# EAGLE board Cansat-2025-2 (EAGLE 9.4.2)
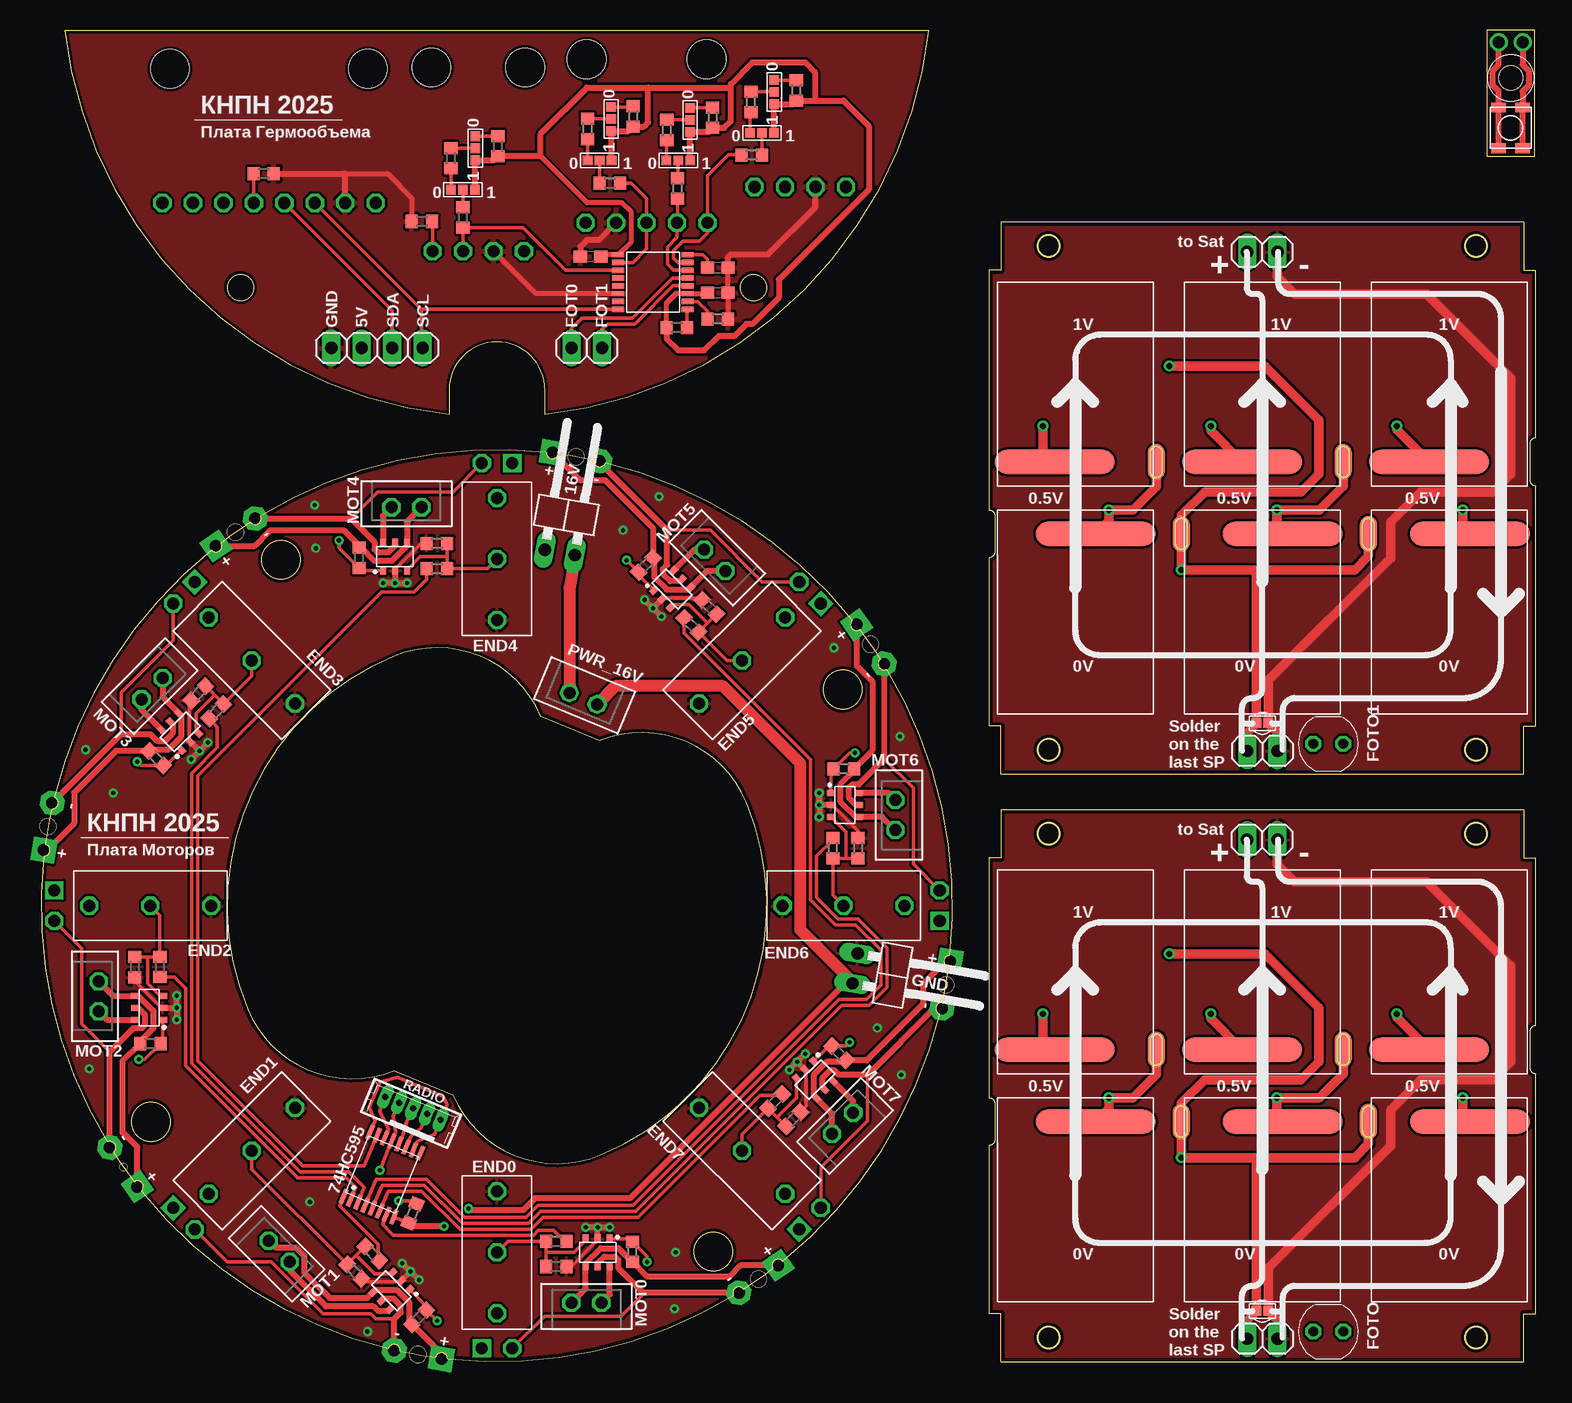
[diagram p0: board, top side]
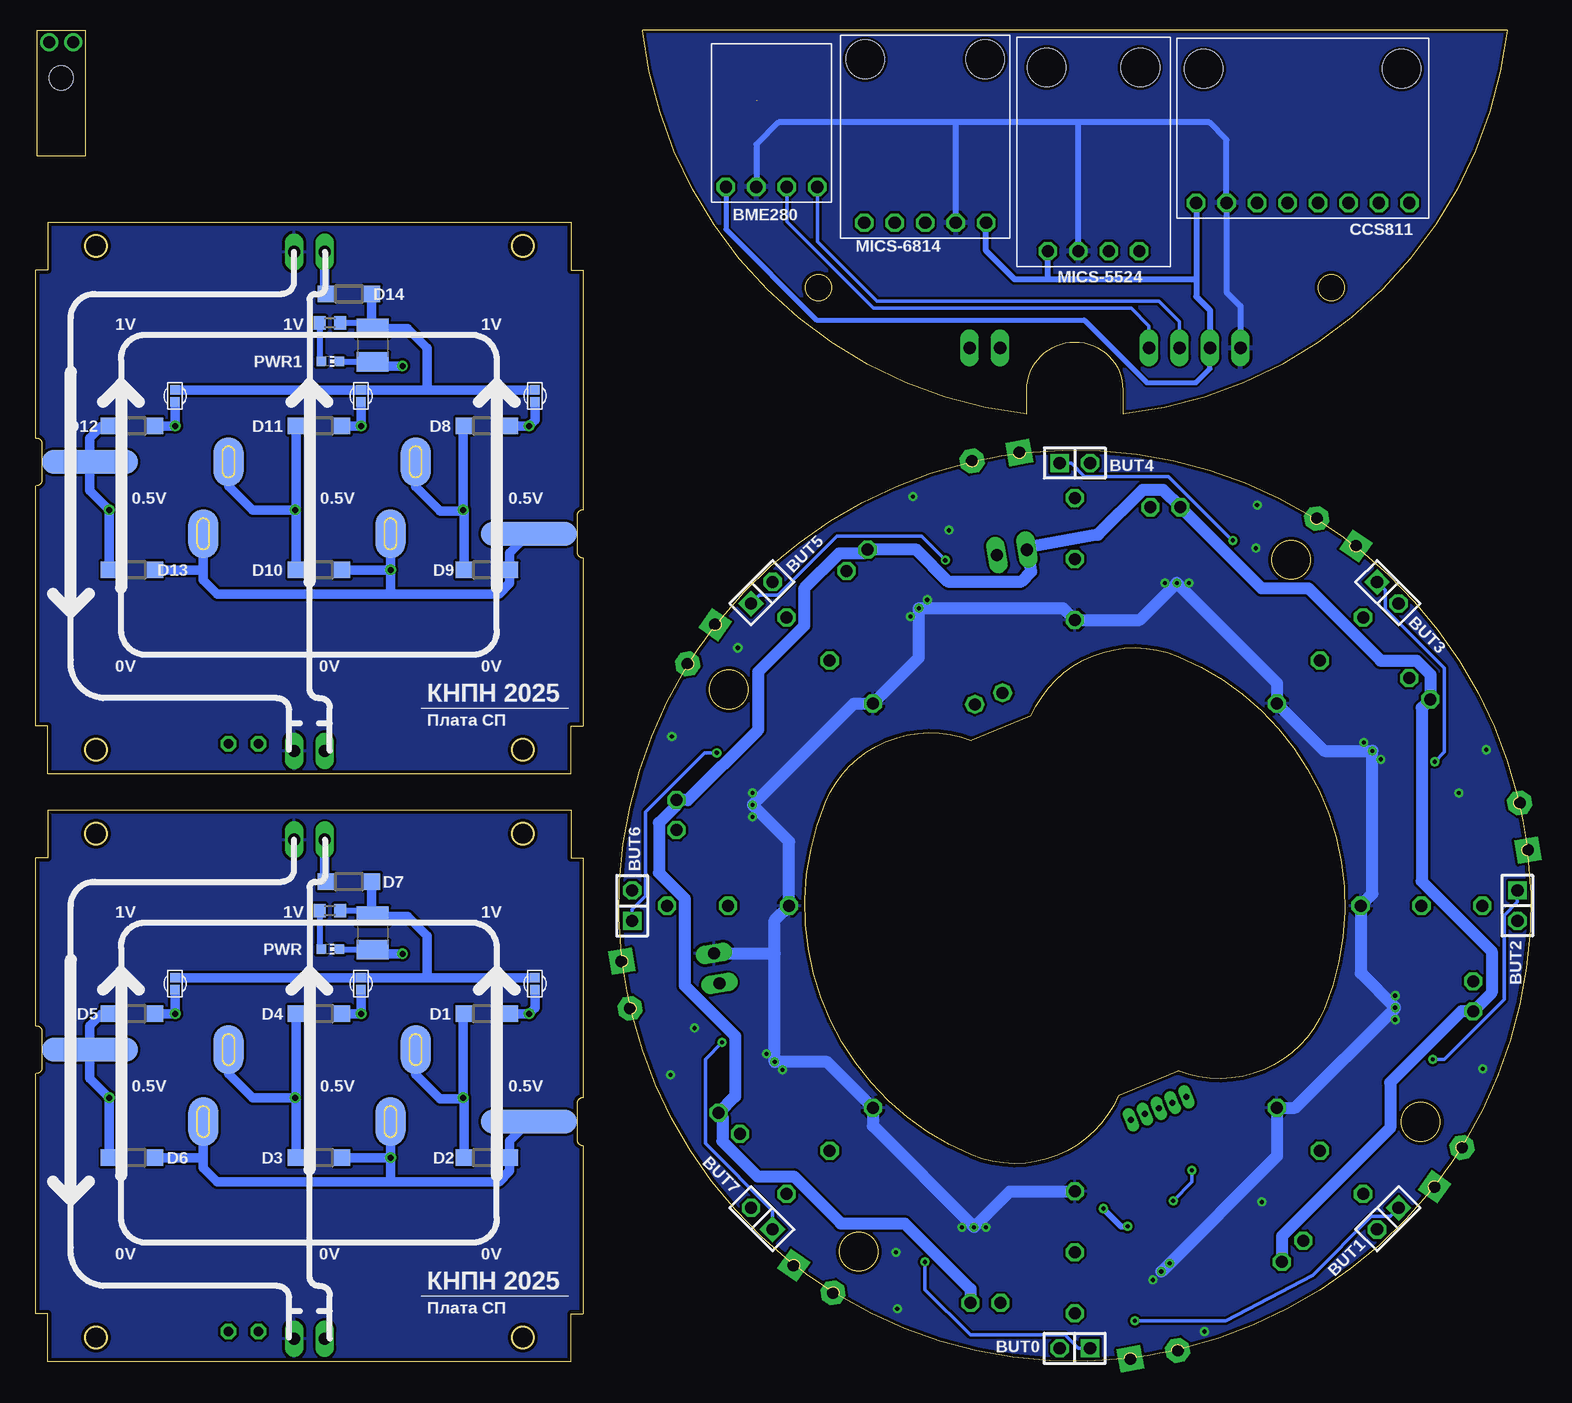
[diagram p1: board, bottom side, seen from below]

Size 124.59 x 111 mm. Coordinates in mm from the lower left corner, seen from the top.
Outline: 79.99,0 123.59,0 123.59,4 124.59,4 124.59,24 arc-90 124.09,24.5 124.09,27.5 arc-90 124.59,28 124.59,42 123.59,42 123.59,46 79.99,46 79.99,42 78.99,42 78.99,22 arc-90 79.49,21.5 79.49,18.5 arc-90 78.99,18 78.99,4 79.99,4 79.99,0
Outline: 79.99,49 123.59,49 123.59,53 124.59,53 124.59,73 arc-90 124.09,73.5 124.09,76.5 arc-90 124.59,77 124.59,91 123.59,91 123.59,95 79.99,95 79.99,91 78.99,91 78.99,71 arc-90 79.49,70.5 79.49,67.5 arc-90 78.99,67 78.99,53 79.99,53 79.99,49
Outline: 33.86,0.22 arc167 32.87,0.34 arc-5 29.91,0.87 arc167 28.95,1.09 arc-37 8.36,14.21 arc167 7.74,14.99 arc-5 6.02,17.45 arc167 5.5,18.29 arc-37 0.21,42.13 arc167 0.33,43.12 arc-5 0.85,46.07 arc167 1.08,47.04 arc-37 14.19,67.63 arc167 14.98,68.24 arc-5 17.44,69.96 arc167 18.28,70.49 arc-37 42.12,75.78 arc167 43.1,75.65 arc-5 46.06,75.13 arc167 47.03,74.91 arc-37 67.62,61.79 arc167 68.23,61.01 arc-5 69.95,58.55 arc167 70.48,57.71 arc-37 75.76,33.87 arc167 75.64,32.88 arc-5 75.12,29.93 arc167 74.9,28.96 arc-37 61.78,8.37 arc167 60.99,7.76 arc-5 58.54,6.04 arc167 57.69,5.51 arc-37 33.86,0.22
Outline: 34.34,22.19 29.39,24.24 arc-89 17.2,29.39 arc-90 29.38,58.79 arc-89 41.63,53.81 46.59,51.76 arc-89 58.77,46.61 arc-90 46.6,17.21 arc-89 34.34,22.19
Outline: 33.99,81 33.99,78.97 arc-77 1.96,111 74.02,111 arc-77 41.99,78.97 41.99,81 arc180 33.99,81
Outline: 120.49,100.5 124.49,100.5 124.49,111 120.49,111 120.49,100.5
Outline: circle at 83.99,2 radius 0.9
Outline: circle at 119.59,2 radius 0.9
Outline: circle at 119.59,44 radius 0.9
Outline: circle at 83.99,44 radius 0.9
Outline: circle at 83.99,51 radius 0.9
Outline: circle at 119.59,51 radius 0.9
Outline: circle at 119.59,93 radius 0.9
Outline: circle at 83.99,93 radius 0.9
Outline: circle at 9.15,19.98 radius 1.6
Outline: circle at 19.97,66.83 radius 1.6
Outline: circle at 56,9.17 radius 1.6
Outline: circle at 66.82,56.02 radius 1.6
Outline: circle at 16.61,89.53 radius 1.1
Outline: circle at 59.36,89.53 radius 1.1
Copper layers (1*16): Top 0.035mm / dielectric 1mm / Bottom 0.035mm
Design rules "default *": minimum track width 0.2mm, minimum drill 0.35mm, track to track 0.2mm, track to pad 0.2mm, pad to pad 0.2mm, via to via 0.2mm, smd to smd 6mil, copper to edge 10mil, drill to drill 6mil, minimum pad ring 10mil, minimum via ring 8mil, stop-mask expansion 4mil, vias tented up to drill 0mil, thermal gap 10mil
Holes 2 mm at 122.49,107

## Footprints (pad centres in the part's own frame; a part is rotated, then mirrored left to right if it is on the bottom)
1X02/90 = drill 1.016 long: 1 -1.27,-3.81; 2 1.27,-3.81
TSSOP16 = smd 1.26 x 0.36: 1 -2.9,2.275; 2 -2.9,1.625; 3 -2.9,0.975; 4 -2.9,0.325; 5 -2.9,-0.325; 6 -2.9,-0.975; 7 -2.9,-1.625; 8 -2.9,-2.275; 9 2.9,-2.275; 10 2.9,-1.625; 11 2.9,-0.975; 12 2.9,-0.325; 13 2.9,0.325; 14 2.9,0.975; 15 2.9,1.625; 16 2.9,2.275
BME280-PINS-ONLY = drill 1.016 octagon: P$1 -3.81,5.33; P$2 -1.27,5.33; P$3 1.27,5.33; P$4 3.81,5.33
1X02 = drill 1.016 square: 1 -1.27,0 | drill 1.016 octagon: 2 1.27,0
C1210 = smd 1.6 x 2.7: 1 -1.4,0; 2 1.4,0
C0603 = smd 1.1 x 1: 1 -0.85,0; 2 0.85,0
CSS811 = drill 1.016 octagon: P$1 6.23,-8.89; P$2 6.23,-6.35; P$3 6.23,-3.81; P$4 6.23,-1.27; P$5 6.23,1.27; P$6 6.23,3.81; P$7 6.23,6.35; P$8 6.23,8.89 | hole 3.2: -4.95,-8.25; -4.95,8.25
SOD123 = smd 1.4 x 1.4: A 1.9,0; C -1.9,0
CONCEVIC = drill 1 octagon: P$1 0,5.08; P$2 0,0; P$3 0,-5.08
VT93N1-VERT = drill 0.8 octagon: P$1 -1.25,0; P$2 1.25,0
1X02' = drill 1.016 long: 1 -1.27,0; 2 1.27,0
1X04 = drill 1.016 long: 1 -3.81,0; 2 -1.27,0; 3 1.27,0; 4 3.81,0
MICS-5524 = drill 1.016 octagon: P$1 -3.81,8.28; P$2 -1.27,8.28; P$3 1.27,8.28; P$4 3.81,8.28 | hole 3.2: -3.9,-7.05; 3.9,-7.05
MICS-6814 = drill 1.016 octagon: P$1 -5.08,7.18; P$2 -2.54,7.18; P$3 0,7.18; P$4 2.54,7.18; P$5 5.08,7.18 | hole 3.2: -5,-6.45; 5,-6.45
JST-2-2.5 = drill 1 pad 1.5 octagon: 1 1.25,0; 2 -1.25,0
CHIP-LED0603 = smd 0.8 x 0.8: A 0,-0.75; C 0,0.75
R0603 = smd 1 x 1.1: 1 -0.85,0; 2 0.85,0
53047-05 = drill 0.5 pad 0.698 long: 1 2.5,0.45; 2 1.25,0.45; 3 0,0.45; 4 -1.25,0.45; 5 -2.5,0.45
SOLAR_0-2_INVERT = smd 2 x 10: IN-2 -6.5,1.7 | smd 4.1 x 2.5 bottom: OUT-2 -6.5,-6.75 | smd 3 x 1.4: OUT-21 -6.5,-6.75
SOLAR_1-2_INVERT = smd 2 x 10: IN-2 -6.5,1.7 | smd 2 x 8 bottom: OUT -6.5,-2.7
VIAS-CONNECT = smd 0.8 x 0.8: 1 -0.5,0; 2 0.5,0
TSOP-6 = smd 0.5 x 0.7: P$1 -1,-1.15; P$2 0,-1.15; P$3 1,-1.15; P$4 1,1.15; P$5 0,1.15; P$6 -1,1.15
CONNECT_3 = smd 0.8 x 0.8: 1 1,0; 2 0,0; 3 -1,0
CONTACT_SIDE_4MM_2PIN = drill 1 pad 2 square: P$1 -2,0 | drill 1 pad 2 octagon: P$2 2,0
AD5593 = smd 0.45 x 1: P$1 -2.275,-2.9; P$2 -1.625,-2.9; P$3 -0.975,-2.9; P$4 -0.325,-2.9; P$5 0.325,-2.9; P$6 0.975,-2.9; P$7 1.625,-2.9; P$8 2.275,-2.9; P$9 2.275,2.9; P$10 1.625,2.9; P$11 0.975,2.9; P$12 0.325,2.9; P$13 -0.325,2.9; P$14 -0.975,2.9; P$15 -1.625,2.9; P$16 -2.275,2.9
BTN-VS-CUT = smd 0.8 x 1.2: P$1 -1.7,1; P$2 1.7,1; P$3 1.7,-1; P$4 -1.7,-1

## Placement (x,y rotation side)
16V  [1X02/90]  43.89,71.2 350 top
74HC595  74HC595  [TSSOP16]  28.41,15.58 67.5 top
BME280  BME280BME280-PINS-ONLY  [BME280-PINS-ONLY]  63.27,103.25 180 bottom
BUT0  [1X02]  37.99,1.1 180 bottom
BUT1  [1X02]  11.89,11.91 225 bottom
BUT2  [1X02]  1.09,38 270 bottom
BUT3  [1X02]  11.89,64.09 315 bottom
BUT4  [1X02]  37.99,74.9 0 bottom
BUT5  [1X02]  64.08,64.09 45 bottom
BUT6  [1X02]  74.89,38 90 bottom
BUT7  [1X02]  64.08,11.91 135 bottom
C1  47u  [C1210]  96.53,35.74 270 bottom
C2  47u  [C1210]  96.53,84.74 270 bottom
C3  100nF  [C0603]  56.39,91.2 0 top
C4  100nF  [C0603]  56.39,89.1 0 top
C5  100nF  [C0603]  45.79,92.1 180 top
CCS811  CCS811  [CSS811]  18.99,102.82 270 bottom
D1  MBR0520LT  [SOD123]  86.99,29 0 bottom
D2  MBR0520LT  [SOD123]  86.99,17 180 bottom
D3  MBR0520LT  [SOD123]  100.99,17 180 bottom
D4  MBR0520LT  [SOD123]  100.99,29 0 bottom
D5  MBR0520LT  [SOD123]  116.59,29 0 bottom
D6  MBR0520LT  [SOD123]  116.59,17 180 bottom
D7  MBR0520LT  [SOD123]  98.49,40 180 bottom
D8  MBR0520LT  [SOD123]  86.99,78 0 bottom
D9  MBR0520LT  [SOD123]  86.99,66 180 bottom
D10  MBR0520LT  [SOD123]  100.99,66 180 bottom
D11  MBR0520LT  [SOD123]  100.99,78 0 bottom
D12  MBR0520LT  [SOD123]  116.59,78 0 bottom
D13  MBR0520LT  [SOD123]  116.59,66 180 bottom
D14  MBR0520LT  [SOD123]  98.49,89 180 bottom
END0  CONCEVIC  [CONCEVIC]  37.99,9.1 0 top
END1  CONCEVIC  [CONCEVIC]  17.55,17.57 315 top
END2  CONCEVIC  [CONCEVIC]  9.09,38 270 top
END3  CONCEVIC  [CONCEVIC]  17.55,58.44 225 top
END4  CONCEVIC  [CONCEVIC]  37.99,66.9 180 top
END5  CONCEVIC  [CONCEVIC]  58.42,58.44 135 top
END6  CONCEVIC  [CONCEVIC]  66.89,38 90 top
END7  CONCEVIC  [CONCEVIC]  58.42,17.57 45 top
FOTO  VT93N1VERT  [VT93N1-VERT]  107.29,2.5 0 top
FOTO1  VT93N1VERT  [VT93N1-VERT]  107.29,51.5 0 top
GND  [1X02/90]  71.59,32.1 260 top
JP1  [1X02']  101.79,43.5 180 top
JP2  [1X02']  101.79,92.5 180 top
JP3  [1X04]  27.99,84.5 0 top
JP4  [1X02']  45.49,84.5 180 top
MICS-5524  MICS_5524  [MICS-5524]  36.43,100.84 180 bottom
MICS-6814  MICS-6814  [MICS-6814]  50.46,102.11 180 bottom
MOT0  JST-2-2.5  [JST-2-2.5]  45.44,4.89 0 top
MOT1  JST-2-2.5  [JST-2-2.5]  19.84,9.19 315 top
MOT2  JST-2-2.5  [JST-2-2.5]  4.78,30.45 270 top
MOT3  JST-2-2.5  [JST-2-2.5]  9.24,56.09 225 top
MOT4  JST-2-2.5  [JST-2-2.5]  30.44,71.21 180 top
MOT5  JST-2-2.5  [JST-2-2.5]  56.14,66.79 135 top
MOT6  JST-2-2.5  [JST-2-2.5]  71.2,45.55 90 top
MOT7  JST-2-2.5  [JST-2-2.5]  66.8,19.85 45 top
PWR  [CHIP-LED0603]  100.05,34.37 270 bottom
PWR1  [CHIP-LED0603]  100.05,83.37 270 bottom
PWR_16V  JST-2-2.5  [JST-2-2.5]  45.17,55.27 157.5 top
R1  2k7  [R0603]  100.09,37.59 180 bottom
R2  2k7  [R0603]  100.09,86.59 180 bottom
R3  100R  [R0603]  42.92,10.02 180 top
R4  10k  [R0603]  42.92,7.91 0 top
R5  10k  [R0603]  49.28,9.15 90 top
R6  100R  [R0603]  27.59,9 135 top
R7  10k  [R0603]  26.09,7.5 315 top
R8  10k  [R0603]  31.5,3.69 225 top
R9  100R  [R0603]  9.89,32.9 90 top
R10  10k  [R0603]  7.8,32.89 270 top
R11  10k  [R0603]  9.09,26.5 180 top
R12  100R  [R0603]  14.59,54.2 45 top
R13  10k  [R0603]  13.09,55.7 225 top
R14  5k1  [R0603]  30.96,12.36 67.5 top
R15  10k  [R0603]  9.59,50.3 135 top
R16  100R  [R0603]  32.99,66.1 0 top
R17  10k  [R0603]  32.99,68.2 180 top
R18  10k  [R0603]  26.49,67 90 top
R19  100R  [R0603]  54.19,61.4 315 top
R20  10k  [R0603]  55.69,62.9 135 top
R21  10k  [R0603]  50.39,66.4 45 top
R22  100R  [R0603]  65.99,42.8 270 top
R23  10k  [R0603]  68.09,42.8 90 top
R24  10k  [R0603]  66.89,49.4 0 top
R25  100R  [R0603]  61.19,21.7 225 top
R26  10k  [R0603]  62.69,20.2 45 top
R27  10k  [R0603]  66.49,25.7 315 top
R28  5k1  [R0603]  18.54,99.03 0 top
R29  10k  [R0603]  47.4,98.23 0 top
R30  10k  [R0603]  53.04,97.79 270 top
R31  10k  [R0603]  35.14,95.37 270 top
R32  5k1  [R0603]  31.74,95.05 180 top
R33  10k  [R0603]  59.22,100.57 180 top
R34  5k1  [R0603]  56.39,86.9 0 top
R35  5k1  [R0603]  52.99,86.2 180 top
R39  100k  [R0603]  59.16,105 270 top
R40  1M  [R0603]  62.94,105.97 90 top
R41  100k  [R0603]  45.54,102.76 270 top
R42  1M  [R0603]  49.34,103.79 90 top
R43  100k  [R0603]  52.14,102.66 270 top
R44  1M  [R0603]  55.96,103.69 90 top
R45  100k  [R0603]  34.14,100.31 270 top
R46  1M  [R0603]  38.06,101.31 90 top
RADIO  MOLEX-5-1.25  [53047-05]  30.82,20.69 337.5 top
SP-OUT  [1X02']  101.79,1.9 0 top
SP-OUT1  [1X02']  101.79,50.9 0 top
U$1  SOLAR-2_INVERT0-2  [SOLAR_0-2_INVERT]  86.19,32.5 90 top
U$2  SOLAR-2_INVERT1-2  [SOLAR_1-2_INVERT]  86.19,13.5 270 top
U$3  SOLAR-2_INVERT0-2  [SOLAR_0-2_INVERT]  101.79,13.5 270 top
U$4  SOLAR-2_INVERT0-2  [SOLAR_0-2_INVERT]  101.79,32.5 90 top
U$5  Плата СП  [LOGO]  92.49,5.5 0 bottom
U$6  SOLAR-2_INVERT1-2  [SOLAR_1-2_INVERT]  117.39,32.5 90 top
U$7  [VIAS-CONNECT]  101.79,4.2 0 top
U$8  SOLAR-2_INVERT0-2  [SOLAR_0-2_INVERT]  117.39,13.5 270 top
U$9  [VIAS-CONNECT]  82.99,31.5 90 bottom
U$10  [VIAS-CONNECT]  97.49,31.5 90 bottom
U$11  [VIAS-CONNECT]  112.99,31.5 90 bottom
U$12  SOLAR-2_INVERT0-2  [SOLAR_0-2_INVERT]  86.19,81.5 90 top
U$13  SOLAR-2_INVERT1-2  [SOLAR_1-2_INVERT]  86.19,62.5 270 top
U$14  SOLAR-2_INVERT0-2  [SOLAR_0-2_INVERT]  101.79,62.5 270 top
U$15  SOLAR-2_INVERT0-2  [SOLAR_0-2_INVERT]  101.79,81.5 90 top
U$16  [VIAS-CONNECT]  101.79,53.2 0 top
U$17  Плата СП  [LOGO]  92.49,54.5 0 bottom
U$18  SOLAR-2_INVERT1-2  [SOLAR_1-2_INVERT]  117.39,81.5 90 top
U$19  SOLAR-2_INVERT0-2  [SOLAR_0-2_INVERT]  117.39,62.5 270 top
U$20  [VIAS-CONNECT]  82.99,80.5 90 bottom
U$21  [VIAS-CONNECT]  97.49,80.5 90 bottom
U$22  [VIAS-CONNECT]  112.99,80.5 90 bottom
U$23  Плата Моторов  [LOGO]  3.31,43.69 0 top
U$24  IRF5852  [TSOP-6]  46.39,9.1 180 top
U$25  IRF5852  [TSOP-6]  29.19,5.9 135 top
U$26  IRF5852  [TSOP-6]  8.99,29.5 90 top
U$27  IRF5852  [TSOP-6]  11.59,52.5 45 top
U$28  IRF5852  [TSOP-6]  29.49,67.1 0 top
U$29  IRF5852  [TSOP-6]  52.59,64.4 315 top
U$30  IRF5852  [TSOP-6]  66.99,46.4 270 top
U$31  CONNECT_3  [CONNECT_3]  54.08,103.51 270 top
U$32  IRF5852  [TSOP-6]  64.49,23.5 225 top
U$33  CONNECT_3  [CONNECT_3]  35.16,97.69 0 top
U$34  CONNECT_3  [CONNECT_3]  36.18,101.15 270 top
U$35  CONTACT_SIDE_4MM_2PIN  [CONTACT_SIDE_4MM_2PIN]  31.39,0.58 170 top
U$36  CONTACT_SIDE_4MM_2PIN  [CONTACT_SIDE_4MM_2PIN]  6.86,16.2 125 top
U$37  CONTACT_SIDE_4MM_2PIN  [CONTACT_SIDE_4MM_2PIN]  0.56,44.6 80 top
U$38  CONTACT_SIDE_4MM_2PIN  [CONTACT_SIDE_4MM_2PIN]  59.78,6.87 215 top
U$39  CONTACT_SIDE_4MM_2PIN  [CONTACT_SIDE_4MM_2PIN]  16.19,69.13 35 top
U$40  CONTACT_SIDE_4MM_2PIN  [CONTACT_SIDE_4MM_2PIN]  44.59,75.42 350 top
U$41  CONTACT_SIDE_4MM_2PIN  [CONTACT_SIDE_4MM_2PIN]  69.11,59.8 305 top
U$42  CONTACT_SIDE_4MM_2PIN  [CONTACT_SIDE_4MM_2PIN]  75.41,31.4 260 top
U$43  Плата Гермообъема  [LOGO]  12.79,103.53 0 top
U$44  CONNECT_3  [CONNECT_3]  60.08,102.41 0 top
U$45  CONNECT_3  [CONNECT_3]  61.1,105.83 270 top
U$46  CONNECT_3  [CONNECT_3]  46.54,100.11 0 top
U$47  CONNECT_3  [CONNECT_3]  47.5,103.57 270 top
U$48  CONNECT_3  [CONNECT_3]  53.1,100.11 0 top
U$49  AD5593  [AD5593]  50.99,90 90 top
U$50  BTN_VERY_SMALLCUT  [BTN-VS-CUT]  122.49,102.85 90 top

## Library data of the parts
16V GND JP1-JP4 SP-OUT SP-OUT1 = pinhead
74HC595 END0 END1-END7 MICS-6814 = CanCubeSat
BME280 CCS811 MICS-5524 MOT0 MOT1-MOT7 PWR_16V RADIO U$5 U$17 U$23 U$31 U$33-U$49 = UNKNOWN-2024
BUT0 BUT1-BUT7 = pinheadCS
C1-C5 = rcl; SPICEPREFIX: C
D1-D14 = diode
FOTO FOTO1 U$1-U$4 U$6-U$16 U$18-U$22 = KNPN-2023
PWR PWR1 = led
R1-R35 R39-R46 = rcl; SPICEPREFIX: R
U$24-U$30 U$32 = NA-2025
U$50 = NEON-BLADE-2023

## Nets
3V1: C4.1 C5.1 R35.2 R40.1 R42.1 R44.1 R46.1 U$31.1 U$33.1 U$34.1 U$44.1 U$45.1 U$46.1 U$47.1 U$48.1 U$49.P$3 U$49.P$9
3V3: 74HC595.10 74HC595.16 RADIO.1
5V: BME280.P$4 CCS811.P$1 JP3.2 MICS-5524.P$4 MICS-6814.P$1
16V_IN: 16V.1 MOT0.1 MOT1.1 MOT2.1 MOT3.1 MOT4.1 MOT5.1 MOT6.1 MOT7.1 U$24.P$6 U$25.P$6 U$26.P$6 U$27.P$6 U$28.P$6 U$29.P$6 U$30.P$6 U$32.P$6
16V_OUT: 16V.2 PWR_16V.1
CO: MICS-6814.P$5 R33.2 U$49.P$7
EN: MICS-5524.P$1 R32.1
FOTO0: JP4.2 U$49.P$5
FOTO1: JP4.1 U$49.P$4
GND: BME280.P$3 C3.2 C4.2 C5.2 CCS811.P$2 JP3.1 MICS-5524.P$3 MICS-6814.P$2 R28.2 R32.2 R34.2 U$49.P$14
GND_IN: END0.P$1 END1.P$1 END2.P$1 END3.P$1 END4.P$1 END5.P$1 END6.P$1 END7.P$1 GND.1 R4.2 R7.2 R10.2 R13.2 R17.2 R20.2 R23.2 R26.2 U$24.P$2 U$25.P$2 U$26.P$2 U$27.P$2 U$28.P$2 U$29.P$2 U$30.P$2 U$32.P$2
GND_OUT: 74HC595.8 GND.2 PWR_16V.2 R14.1
LATCH_SR: 74HC595.12 RADIO.3
MICS: MICS-5524.P$2 R31.2 U$49.P$11
MOTOR0: 74HC595.7 R3.1
MOTOR1: 74HC595.1 R6.1
MOTOR2: 74HC595.2 R9.1
MOTOR3: 74HC595.3 R12.1
MOTOR4: 74HC595.15 R16.1
MOTOR5: 74HC595.4 R19.1
MOTOR6: 74HC595.5 R22.1
MOTOR7: 74HC595.6 R25.1
N$1: D7.A JP1.2
N$2: D5.A U$6.IN-2 U$11.1
N$3: D4.A U$4.IN-2 U$10.1
N$4: PWR.A R1.2
N$5: D1.C D2.A U$1.OUT-2 U$1.OUT-21 U$2.IN-2
N$6: D3.A D4.C U$3.IN-2 U$4.OUT-2 U$4.OUT-21
N$7: D1.A U$1.IN-2 U$9.1
N$8: D5.C D6.A U$6.OUT U$8.IN-2
N$9: PWR1.A R2.2
N$10: D12.C D13.A U$18.OUT U$19.IN-2
N$11: D14.A JP2.2
N$12: D8.C D9.A U$12.OUT-2 U$12.OUT-21 U$13.IN-2
N$13: D11.A U$15.IN-2 U$21.1
N$14: D12.A U$18.IN-2 U$22.1
N$15: D8.A U$12.IN-2 U$20.1
N$16: D10.A D11.C U$14.IN-2 U$15.OUT-2 U$15.OUT-21
N$17: MOT0.2 R5.1 U$24.P$4 U$38.P$1
N$18: END0.P$2 R3.2 R4.1 U$24.P$3
N$19: END1.P$2 R6.2 R7.1 U$25.P$3
N$20: END2.P$2 R9.2 R10.1 U$26.P$3
N$21: BUT0.2 U$24.P$5 U$38.P$2
N$22: BUT0.1 R5.2 U$24.P$1
N$23: BUT1.2 U$25.P$5 U$35.P$2
N$24: BUT1.1 R8.1 U$25.P$1
N$25: MOT1.2 R8.2 U$25.P$4 U$35.P$1
N$26: MOT2.2 R11.2 U$26.P$4 U$36.P$1
N$27: BUT2.2 U$26.P$5 U$36.P$2
N$28: BUT2.1 R11.1 U$26.P$1
N$29: END3.P$2 R12.2 R13.1 U$27.P$3
N$30: MOT3.2 R15.2 U$27.P$4 U$37.P$1
N$31: BUT3.2 U$27.P$5 U$37.P$2
N$32: BUT3.1 R15.1 U$27.P$1
N$33: END4.P$2 R16.2 R17.1 U$28.P$3
N$34: MOT4.2 R18.2 U$28.P$4 U$39.P$1
N$35: BUT4.2 U$28.P$5 U$39.P$2
N$36: BUT4.1 R18.1 U$28.P$1
N$37: END5.P$2 R19.2 R20.1 U$29.P$3
N$38: MOT5.2 R21.2 U$29.P$4 U$40.P$1
N$39: BUT5.2 U$29.P$5 U$40.P$2
N$40: BUT5.1 R21.1 U$29.P$1
N$41: END6.P$2 R22.2 R23.1 U$30.P$3
N$42: MOT6.2 R24.2 U$30.P$4 U$41.P$1
N$43: BUT6.2 U$30.P$5 U$41.P$2
N$44: BUT6.1 R24.1 U$30.P$1
N$45: END7.P$2 R25.2 R26.1 U$32.P$3
N$46: MOT7.2 R27.2 U$32.P$4 U$42.P$1
N$47: BUT7.2 U$32.P$5 U$42.P$2
N$48: BUT7.1 R27.1 U$32.P$1
N$49: R39.2 U$44.3
N$50: R33.1 U$44.2
N$51: R40.2 U$45.3
N$52: R39.1 U$45.2
N$53: R41.2 U$46.3
N$54: R29.1 U$46.2
N$55: R42.2 U$47.3
N$56: R41.1 U$47.2
N$57: R43.2 U$48.3
N$58: R30.1 U$48.2
N$59: R44.2 U$31.3
N$60: R43.1 U$31.2
N$61: R45.2 U$33.3
N$62: R31.1 U$33.2
N$63: R46.2 U$34.3
N$64: R45.1 U$34.2
N$65: C3.1 U$49.P$8
N$66: R34.1 U$49.P$2
N$67: R35.1 U$49.P$1
NH3: MICS-6814.P$4 R30.2 U$49.P$6
NO2: MICS-6814.P$3 R29.2 U$49.P$10
OE_SR: 74HC595.13 R14.2 RADIO.4
P1: U$50.P$1 U$50.P$2
P2: U$50.P$3 U$50.P$4
SCK_SENS: 74HC595.11 RADIO.2
SCL: BME280.P$2 CCS811.P$3 JP3.4 U$49.P$16
SDA: BME280.P$1 CCS811.P$4 JP3.3 U$49.P$15
SHIFT: 74HC595.14 RADIO.5
SP+: C1.1 D7.C R1.1 U$9.2 U$10.2 U$11.2
SP+1: C2.1 D14.C R2.1 U$20.2 U$21.2 U$22.2
SP+-: C1.2 D2.C D3.C D6.C PWR.C SP-OUT.1 U$2.OUT U$3.OUT-2 U$3.OUT-21 U$7.1 U$8.OUT-2 U$8.OUT-21
SP+-1: C2.2 D9.C D10.C D13.C PWR1.C SP-OUT1.1 U$13.OUT U$14.OUT-2 U$14.OUT-21 U$16.1 U$19.OUT-2 U$19.OUT-21
SP-: JP1.1 SP-OUT.2 U$7.2
SP-1: JP2.1 SP-OUT1.2 U$16.2
WAC: CCS811.P$5 R28.1

## Tracks (layer width: path | path; a pad name or v marks a point on that pad's centre or on a via)
3V1  (1 unrouted)
  Top 0.4: R35.2 52.09,86.25 52.09,88.2 52.91,89.03 U$49.P$3 55.46,89.03 C4.1 | C5.1 46.81,92.28 U$49.P$9 49.19,93.38 49.19,95.8 48.39,96.6 45.49,96.6 41.63,100.46
  Top 0.5: U$44.1 61.1,102.43 U$45.1 62.65,104.83 R40.1 64.51,105.12 | U$48.1 54.08,100.13 U$31.1 55.63,102.51 R44.1 56.93,102.84 57.49,103.4 57.49,106.2 | U$46.1 47.54,102.53 U$47.1 48.97,102.57 R42.1 50.23,102.94 50.59,103.3 50.59,106.2 | U$33.1 36.16,100.13 U$34.1 37.75,100.15 R46.1 41.63,100.46 41.63,102.34 45.49,106.2 50.59,106.2 | 57.49,106.2 57.49,106.5 59.29,108.3 63.69,108.3 64.49,107.5 64.49,105.12 66.87,105.12 68.99,103 68.99,97.7 61.49,90.2 61.49,88.7 59.29,86.5 58.79,86.5 57.79,85.5 56.49,85.5 55.29,84.3 53.09,84.3 52.14,85.25 R35.2 | 50.59,106.2 57.49,106.2
3V3
  Top 0.3: 74HC595.10 31.33,18.37 32.79,18.95 RADIO.1 33.84,21.41 33.49,22.1 33.36,22.17 29.71,23.68 28.26,23.32 27.34,21.18 27.81,20.06 74HC595.16
5V
  Bottom 0.4: BME280.P$4 67.08,94.39 59.51,86.82 37.21,86.82 31.99,81.6 27.89,81.6 26.72,82.77 JP3.2
  Bottom 0.5: CCS811.P$1 27.88,90.2 | 27.88,90.2 27.88,88.79 26.72,87.63 JP3.2 | 27.88,90.2 40.29,90.2 | 40.29,90.2 42.99,90.2 45.39,92.6 MICS-6814.P$1 | MICS-5524.P$4 40.29,92.51 40.29,90.2
16V_IN
  Top 0.5: MOT0.1 47.39,5.59 U$24.P$6 | MOT7.1 67.68,21.72 U$32.P$6 | MOT6.1 70.6,47.4 U$30.P$6 | U$29.P$6 54.45,67.67 MOT5.1 | MOT4.1 28.49,70.51 U$28.P$6 | MOT3.1 8.35,54.32 U$27.P$6 | MOT2.1 5.48,28.5 U$26.P$6 | MOT1.1 20.72,7.61 23.73,4.6 27.69,4.6 28.09,4.2 28.9,4.2 U$25.P$6
  Bottom 1: MOT1.1 20.72,10.44 11.7,19.46 11.7,23.26 5.75,29.2 MOT2.1 3.23,30.74 3.23,34.2 9.06,40.03 9.06,54.49 MOT3.1 8.35,57.26 9.52,58.43 12.48,58.43 18.53,64.47 22.42,64.47 29.17,71.22 MOT4.1 30.64,72.66 32.33,72.66 36.06,68.94 41.77,67.88 16V.1 41.65,65.84 42.49,65 48.51,65 51.19,67.67 MOT5.1 55.57,67.36 57.62,67.36 60.56,64.42 60.56,61.32 64.39,57.48 64.39,52.66 70.26,46.8 MOT6.1 71.2,46.36 72.65,44.9 72.65,40.74 70.51,38.6 70.51,31.34 66.3,27.13 66.3,22.09 67.66,20.73 MOT7.1 67.37,20.42 67.37,18.36 64.43,15.43 61.41,15.43 57.5,11.52 52.18,11.52 46.69,6.03 MOT0.1
16V_OUT
  Top 1: PWR_16V.1 44.02,64.5 16V.2
CO
  Top 0.3: U$49.P$7 53.06,91.62 52.69,92 52.69,92.6 53.49,93.4 54.89,93.4 55.54,94.05 MICS-6814.P$5 55.54,98.85 57.29,100.6 58.34,100.6 R33.2
EN
  Top 0.3: MICS-5524.P$1 32.62,95.02 R32.1
FOTO0
  Top 0.3: U$49.P$5 52.61,90.33 49.29,87 45.09,87 44.18,86.09 JP4.2
FOTO1
  Top 0.3: U$49.P$4 52.67,89.67 49.49,86.5 47.19,86.5 46.72,86.03 JP4.1
GND
  Top 0.4: R34.2 C4.2 C3.2 | U$49.P$14 41.23,89.03 MICS-5524.P$3 | 25.29,99.03 28.86,99.03 30.89,97 R32.2
  Top 0.5: R28.2 25.29,99.03 25.34,98.98 CCS811.P$2 | C3.2 57.24,92.05 57.49,92.3 60.59,92.3 64.54,96.25 BME280.P$3 | MICS-6814.P$2 46.49,93.5 45.49,93.5 44.94,92.95 C5.2
  Bottom 0.5: JP3.1 24.18,87.99 25.34,89.15 CCS811.P$2 25.34,101.85 26.79,103.3 37.69,103.3 | 37.69,103.3 48.09,103.3 | 48.09,103.3 62.69,103.3 64.54,101.45 BME280.P$3 | MICS-5524.P$3 37.7,103.29 37.69,103.3 | MICS-6814.P$2 47.92,103.13 48.09,103.3
  pour Bottom: 1.94,111 1.94,78.95 74.04,78.95 74.04,111
  pour Top: 1.94,111 1.94,78.95 74.04,78.95 74.04,111
GND_IN  (via drill 0.35)
  Top 0.3: R4.2 44.14,7.91 46.39,10.15 U$24.P$2 | U$32.P$2 63.74,24.25 63.74,21.25 R26.2 | R20.2 54.93,63.65 51.84,63.65 U$29.P$2 | R17.2 31.64,68.2 29.49,66.05 U$28.P$2 | R13.2 12.33,54.95 12.33,51.75 U$27.P$2 | U$26.P$2 10.04,29.5 7.8,31.74 R10.2 | R7.2 26.94,6.65 29.93,6.65 U$25.P$2 | R23.2 68.09,44.24 65.93,46.4 U$30.P$2
  Top 0.5: U$24.P$2 v46.39,11.2 | v46.39,11.2 v47.39,11.2 | v46.39,11.2 v45.39,11.2 | U$32.P$2 v63.01,24.97 | v63.01,24.97 v63.69,25.65 | v63.01,24.97 v62.37,24.33 v62.37,24.32 | U$30.P$2 v64.85,46.4 | v64.85,46.4 v64.85,47.38 v64.85,47.39 | v64.85,46.4 v64.85,45.39 | U$29.P$2 v50.99,62.8 | v50.99,62.8 v50.29,63.5 | v50.99,62.8 v51.69,62.1 | U$28.P$2 v29.49,64.9 | v29.49,64.9 v30.49,64.9 | v29.49,64.9 v28.49,64.9 | U$27.P$2 v13.19,50.9 | v13.19,50.9 | v13.19,50.9 v12.49,50.2 | v13.19,50.9 v13.89,51.6 | U$26.P$2 v11.29,29.5 | v11.29,29.5 v11.29,30.5 | v11.29,29.5 v11.29,28.5 | U$25.P$2 v30.79,7.5 | v30.79,7.5 v30.09,8.2 | v30.79,7.5 v31.49,6.8
  Bottom 1: END0.P$1 43.41,14.18 v46.39,11.2 54.83,19.64 END7.P$1 58.65,24.97 v63.01,24.97 63.01,34.02 | 63.01,34.02 63.01,36.8 END6.P$1 61.81,43.35 v64.85,46.4 56.41,54.84 END5.P$1 50.99,58.69 v50.99,62.8 38.97,62.8 END4.P$1 32.57,61.82 v29.49,64.9 21.14,56.56 END3.P$1 17.2,50.9 v13.19,50.9 13.19,38.98 END2.P$1 14.17,32.38 v11.29,29.5 19.63,21.16 END1.P$1 21.14,17.14 v30.79,7.5 | GND.1 63.02,34.01 63.01,34.02
  other vias: 66.09,59.5 71.59,52.1 69.69,27.8 71.69,23.9 52.89,9.1 52.79,4.4 27.19,2.5 22.39,13.3 3.99,24.4 5.99,47.4 3.69,51 22.89,67.8 22.79,71.4 48.49,69.3 51.49,72.1
  pour Top: 21.99,76 53.99,76 75.99,54 75.99,22 53.99,0 21.99,0 -0.01,22 -0.01,54
  pour Bottom: 21.99,76 53.99,76 75.99,54 75.99,22 53.99,0 21.99,0 -0.01,22 -0.01,54
GND_OUT  (via drill 0.35)
  Top 0.3: R14.1 74HC595.8
  Top 0.5: GND.2 67.6,31.5 66.95,31.5 49.07,13.62 41.15,13.62 40.15,12.62 35.74,12.62 v35.61,12.75 | v33.59,11.27 30.94,11.27 R14.1
  Top 1: GND.2 67.61,31.65 63.27,35.99 63.27,49.84 56.81,56.3 47.84,56.3 PWR_16V.2
  Bottom 0.5: v35.61,12.75 34.13,11.27 v33.59,11.27
LATCH_SR
  Top 0.3: 74HC595.12 30.15,18.93 30.47,19.99 RADIO.3
MICS
  Top 0.3: U$49.P$11 43.69,90.97 40.14,94.52 R31.2 35.16,94.5 MICS-5524.P$2
MOTOR0
  Top 0.3: R3.1 43.61,10.02 42.71,10.92 41.42,10.92 41.02,10.52 29.35,10.52 28.44,11.43 74HC595.7
MOTOR1
  Top 0.3: R6.1 28.08,8.51 28.08,9.78 24.86,12.99 74HC595.1
MOTOR2
  Top 0.3: 74HC595.2 26.2,14.53 25.42,15.3 21.38,15.3 12.04,24.64 12.04,31.09 11.08,32.05 R9.1
MOTOR3
  Top 0.3: 74HC595.3 26.9,14.53 25.63,15.8 21.58,15.8 12.54,24.85 12.54,49.03 14.68,51.18 14.68,52.9 R12.1
MOTOR4
  Top 0.3: 74HC595.15 26.92,16.3 21.79,16.3 13.04,25.06 13.04,48.83 28.36,64.15 31.08,64.15 32.14,65.2 R16.1
MOTOR5
  Top 0.3: 74HC595.4 27.93,15.2 32.13,15.2 35.31,12.02 40.4,12.02 41.4,13.02 49.32,13.02 66.5,30.2 68.78,30.2 69.99,31.41 69.99,34.29 67.88,36.4 66.22,36.4 64.12,38.5 64.12,50.19 53.59,60.73 R19.1
MOTOR6
  Top 0.3: 74HC595.5 28.43,14.7 31.92,14.7 35.1,11.52 40.61,11.52 41.61,12.52 49.53,12.52 66.71,29.7 68.99,29.7 70.49,31.2 70.49,34.5 68.09,36.9 66.43,36.9 64.62,38.7 64.62,42.13 65.99,43.49 R22.1
MOTOR7
  Top 0.3: 74HC595.6 28.89,14.2 31.72,14.2 34.89,11.02 40.81,11.02 41.81,12.02 49.73,12.02 59.91,22.19 61.68,22.19 R25.1
N$1
  Bottom 0.8: JP1.2 100.52,40.13 D7.A
N$2  (via drill 0.5)
  Top 0.8: U$6.IN-2 112.99,28.7 v112.99,29
  Bottom 0.8: D5.A v112.99,29 U$11.1
N$3  (via drill 0.5)
  Top 0.8: U$4.IN-2 97.49,28.6 v97.49,29
  Bottom 0.8: D4.A v97.49,29 U$10.1
N$4
  Bottom 0.5: R1.2 100.94,34.51 PWR.A
N$5  (via drill 0.5)
  Top 0.8: U$1.OUT-21 92.94,23.95 90.99,22 v88.99,22 88.99,21.1 U$2.IN-2
  Bottom 0.8: 88.89,21.9 D2.A | 88.89,21.9 v88.99,22 88.99,28.9 D1.C | U$1.OUT-21 92.94,23.95 90.89,21.9 88.89,21.9
N$6  (via drill 0.5)
  Top 0.8: U$3.IN-2 102.99,20.5 v102.99,22 106.54,22 108.54,24 U$4.OUT-21
  Bottom 0.8: U$4.OUT-21 108.54,24 106.54,22 v102.99,22 | D3.A 102.89,21.9 v102.99,22 | v102.99,22 102.89,22.1 D4.C
N$7  (via drill 0.5)
  Top 0.8: U$1.IN-2 83.49,27 v83.49,29
  Bottom 0.8: 85.09,29.1 84.99,29 | D1.A v83.49,29 82.99,29.5 U$9.1
N$8  (via drill 0.5)
  Top 0.8: U$8.IN-2 118.49,20.6 v118.49,22
  Bottom 0.8: D5.C 119.09,29 120.09,28 U$6.OUT 120.09,23.6 v118.49,22 D6.A
N$9
  Bottom 0.5: R2.2 100.94,83.51 PWR1.A
N$10  (via drill 0.5)
  Top 0.8: U$19.IN-2 118.49,69.6 v118.49,71
  Bottom 0.8: D12.C 119.09,78 120.09,77 U$18.OUT 120.09,72.6 v118.49,71 D13.A
N$11
  Bottom 0.8: JP2.2 100.52,89.13 D14.A
N$12  (via drill 0.5)
  Top 0.8: U$12.OUT-21 92.94,72.95 90.99,71 v88.99,71 88.99,70.1 U$13.IN-2
  Bottom 0.8: 88.89,70.9 D9.A | 88.89,70.9 v88.99,71 88.99,77.9 D8.C | U$12.OUT-21 92.94,72.95 90.89,70.9 88.89,70.9
N$13  (via drill 0.5)
  Top 0.8: U$15.IN-2 97.49,77.6 v97.49,78
  Bottom 0.8: D11.A v97.49,78 U$21.1
N$14  (via drill 0.5)
  Top 0.8: U$18.IN-2 112.99,77.7 v112.99,78
  Bottom 0.8: D12.A v112.99,78 U$22.1
N$15  (via drill 0.5)
  Top 0.8: U$12.IN-2 83.49,76 v83.49,78
  Bottom 0.8: 85.09,78.1 84.99,78 | D8.A v83.49,78 82.99,78.5 U$20.1
N$16  (via drill 0.5)
  Top 0.8: U$14.IN-2 102.99,69.5 v102.99,71 106.54,71 108.54,73 U$15.OUT-21
  Bottom 0.8: U$15.OUT-21 108.54,73 106.54,71 v102.99,71 | D10.A 102.89,70.9 v102.99,71 | v102.99,71 102.89,71.1 D11.C
N$17
  Top 0.5: MOT0.2 45.39,6.09 U$24.P$4 45.39,8.19 46.65,9.45 48.11,9.45 49.26,8.3 R5.1 50.51,7.07 57.35,7.07 58.31,8.02 U$38.P$1
N$18
  Top 0.3: 42.07,9.1 R3.2 38.91,10.02 END0.P$2 | 42.07,9.1 R4.1 | U$24.P$3 45.39,10.1 44.41,9.12 42.09,9.12 42.07,9.1
N$19
  Top 0.3: 26.24,8.85 R7.1 17.55,16.04 END1.P$2 | 26.24,8.85 R6.2 | 26.24,8.85 27.78,7.31 29.18,7.31 U$25.P$3
N$20
  Top 0.3: 8.89,33.74 R9.2 9.89,37.2 END2.P$2 | 8.89,33.74 R10.1 | 8.89,33.74 8.89,31.51 9.89,30.5 U$26.P$3
N$21
  Top 0.3: BUT0.2 41.94,3.79 48.34,3.79 50.28,5.72
  Top 0.5: U$24.P$5 46.39,8.19 46.95,8.75 47.82,8.75 48.09,8.49 48.09,7.8 50.17,5.72 50.28,5.72 U$38.P$2
N$22  (via drill 0.35)
  Top 0.3: U$24.P$1 49.03,10.25 R5.2 50.49,8.79 v50.49,8.3
  Bottom 0.3: BUT0.1 37.68,1.1 38.8,2.21 46.7,2.21 50.49,6 v50.49,8.3
N$23
  Top 0.3: BUT1.2 15.49,8.31 19.16,8.31 22.63,4.84 22.64,4.84 23.48,4 27.44,4 27.87,3.57 29.43,3.57
  Top 0.5: U$25.P$5 28.54,5.25 29.34,5.25 29.95,4.64 29.95,4.09 29.43,3.57 29.42,3.56 U$35.P$2
N$24  (via drill 0.35)
  Top 0.3: U$25.P$1 32.1,4.62 R8.1 v32.99,3.4
  Bottom 0.3: BUT1.1 11.68,12.12 13.25,12.12 18.17,7.21 25.38,3.4 v32.99,3.4
N$25
  Top 0.5: U$35.P$1 33.36,0.63 R8.2 30.65,3.33 30.65,4.93 29.62,5.96 27.83,5.96 U$25.P$4 27.17,5.3 24.02,5.3 21.92,7.39 21.92,8.8 21.22,9.51 19.52,9.51 MOT1.2
N$26
  Top 0.5: MOT2.2 5.98,30.5 U$26.P$4 8.07,30.5 9.34,29.24 9.34,27.77 8.24,26.67 R11.2 6.79,25.05 6.79,19.1 8.01,17.88 U$36.P$1
N$27
  Top 0.3: BUT2.2 3.37,34.44 3.37,28.16 5.71,25.82
  Top 0.5: U$36.P$2 5.71,25.82 7.69,27.8 8.37,27.8 8.64,28.06 8.64,28.94 8.07,29.5 U$26.P$5
N$28  (via drill 0.35)
  Top 0.3: U$26.P$1 10.14,26.7 R11.1 8.64,25.19 v8.14,25.19
  Bottom 0.3: BUT2.1 1.09,38.3 2.2,37.19 2.2,30.19 7.2,25.19 v8.14,25.19
N$29
  Top 0.3: R13.1 14.44,55.55 | 14.44,55.55 R12.2 17.55,57.16 END3.P$2 | 14.44,55.55 12.89,54.01 12.89,52.61 U$27.P$3
N$30
  Top 0.5: MOT3.2 10.12,55.38 U$27.P$4 11.65,53.85 11.65,52.07 10.61,51.03 9.12,51.03 R15.2 6.23,50.9 2.74,47.4 2.74,44.85 0.52,42.63 U$37.P$1
N$31
  Top 0.3: 6.64,52.3 6.65,52.31 6.65,55.76 11,60.11 BUT3.2
  Top 0.5: U$37.P$2 6.64,52.3 9.08,52.3 9.65,51.73 10.32,51.73 10.94,52.35 10.94,53.15 U$27.P$5
N$32  (via drill 0.35)
  Top 0.3: U$27.P$1 10.41,49.7 8.29,49.7 v7.99,50
  Bottom 0.3: BUT3.1 12.11,64.31 12.11,62.73 7.19,57.81 7.19,50.8 v7.99,50
N$33
  Top 0.3: R17.1 33.84,67.1 | 33.84,67.1 R16.2 37.19,66.1 END4.P$2 | 33.84,67.1 31.59,67.1 30.49,66 U$28.P$3
N$34
  Top 0.5: MOT4.2 30.49,70.01 U$28.P$4 30.49,68.01 29.22,66.75 27.76,66.75 26.66,67.85 | 26.66,67.85 R18.2 | U$39.P$1 17.77,67.98 19.09,69.3 25.21,69.3 26.66,67.85
N$35
  Top 0.3: BUT4.2 34.32,72.5 28.04,72.5 25.81,70.28
  Top 0.5: U$39.P$2 25.81,70.28 27.79,68.3 27.79,67.71 28.05,67.45 28.92,67.45 29.49,68.01 U$28.P$5
N$36  (via drill 0.35)
  Top 0.3: U$28.P$1 26.69,65.95 R18.1 24.81,67.82 v24.81,68.45
  Bottom 0.3: BUT4.1 38.29,74.9 37.18,73.79 30.17,73.79 24.84,68.45 v24.81,68.45
N$37
  Top 0.3: END5.P$2 57.15,58.44 R19.2 55.54,61.55 | R20.1 55.54,61.55 | 55.54,61.55 53.99,63.09 52.69,63.09 U$29.P$3
N$38
  Top 0.5: MOT5.2 55.51,65.91 U$29.P$4 53.94,64.34 52.15,64.34 51.12,65.37 51.12,67.17 50.99,67.3 | 50.99,67.3 50.99,69.5 47.02,73.47 44.92,73.47 U$40.P$1 | 50.99,67.3 R21.2
N$39
  Top 0.3: 52.18,69.31 55.78,69.31 60.1,64.99 BUT5.2
  Top 0.5: U$40.P$2 46.55,74.93 52.18,69.31 52.18,66.4 51.82,66.04 51.82,65.66 52.44,65.05 53.23,65.05 U$29.P$5
N$40  (via drill 0.35)
  Top 0.3: U$29.P$1 49.79,65.58 R21.1 v48.79,66.8
  Bottom 0.3: BUT5.1 64.29,63.88 62.72,63.88 57.8,68.8 50.79,68.8 v48.79,66.8
N$41
  Top 0.3: R23.1 67.09,41.95 | 67.09,41.95 R22.2 65.99,38.9 END6.P$2 | U$30.P$3 67.09,44.15 67.09,41.95
N$42
  Top 0.5: MOT6.2 70.1,45.4 U$30.P$4 67.9,45.4 66.64,46.66 66.64,48.13 67.74,49.23 R24.2 69.29,50.95 69.29,56.7 67.97,58.02 U$41.P$1
N$43
  Top 0.3: BUT6.2 72.69,41.47 72.69,47.8 70.25,50.23
  Top 0.5: U$30.P$5 67.9,46.4 67.34,46.96 67.34,47.84 67.6,48.1 68.12,48.1 70.25,50.23 70.26,50.24 U$41.P$2
N$44  (via drill 0.35)
  Top 0.3: U$30.P$1 65.84,49.2 R24.1 67.38,50.74 v67.84,50.74
  Bottom 0.3: BUT6.1 74.89,37.7 73.77,38.81 73.77,45.81 68.84,50.74 v67.84,50.74
N$45
  Top 0.3: 61.34,20.35 R25.2 58.42,18.93 END7.P$2 | 61.34,20.35 R26.1 | U$32.P$3 62.97,21.98 61.34,20.35
N$46
  Top 0.5: MOT7.2 65.91,20.66 U$32.P$4 64.43,22.15 64.43,23.93 65.46,24.97 66.96,24.97 R27.2 68.79,25.1 73.49,29.8 73.49,31.5 75.36,33.37 U$42.P$1
N$47
  Top 0.3: BUT7.2 64.98,16.17 68.89,20.08 68.89,23.9 68.89,23.91
  Top 0.5: U$42.P$2 74.42,29.43 68.89,23.91 66.48,23.91 66.12,24.27 65.75,24.27 65.13,23.65 65.13,22.85 U$32.P$5
N$48  (via drill 0.35)
  Top 0.3: U$32.P$1 65.66,26.3 67.09,26.3 v67.39,26.6
  Bottom 0.3: BUT7.1 63.18,12.58 68.79,18.19 68.79,25.2 v67.39,26.6
N$49
  Top 0.3: U$44.3 59.08,104.07 R39.2
N$50
  Top 0.3: U$44.2 R33.1
N$51
  Top 0.3: U$45.3 R40.2
N$52
  Top 0.3: R39.1 61.08,105.85 U$45.2
N$53
  Top 0.3: U$46.3 R41.2
N$54
  Top 0.3: R29.1 U$46.2
N$55
  Top 0.3: U$47.3 49.27,104.57 R42.2
N$56
  Top 0.3: R41.1 47.46,103.61 U$47.2
N$57
  Top 0.3: R43.2 52.14,100.15 U$48.3
N$58
  Top 0.3: U$48.2 53.1,98.7 R30.1
N$59
  Top 0.3: U$31.3 55.93,104.51 R44.2
N$60
  Top 0.3: R43.1 U$31.2
N$61
  Top 0.3: U$33.3 34.16,99.44 R45.2
N$62
  Top 0.3: U$33.2 35.16,96.24 R31.1
N$63
  Top 0.3: U$34.3 R46.2
N$64
  Top 0.3: R45.1 U$34.2
N$65
  Top 0.3: U$49.P$8 55.11,92.28 55.54,91.85 C3.1
N$66
  Top 0.3: U$49.P$2 54.71,88.38 55.54,87.55 R34.1
N$67
  Top 0.3: R35.1 53.84,87.67 U$49.P$1
NH3
  Top 0.3: R30.2 53.04,94.97 MICS-6814.P$4 53,93.71 52.19,92.9 52.19,91.5 52.71,90.97 U$49.P$6
NO2
  Top 0.3: U$49.P$10 49.31,91.62 50.46,92.77 MICS-6814.P$3 50.46,96.93 49.16,98.23 R29.2
OE_SR  (via drill 0.35)
  Top 0.3: RADIO.4 29.32,20.43 29.53,19.14 74HC595.13 29.18,18.35 v28.23,15.94 | R14.2 31.03,13.4 v29.79,13.4
  Bottom 0.3: v29.79,13.4 28.23,14.96 v28.23,15.94
P1  (via drill 1)
  Top 0.5: v121.49,110 121.49,108.12 120.99,107.62 120.99,106.38 121.49,105.88 U$50.P$2 U$50.P$1
P2  (via drill 1)
  Top 0.5: v123.49,110 123.49,108.12 123.99,107.62 123.99,106.38 123.49,105.88 U$50.P$3 U$50.P$4
SCK_SENS
  Top 0.3: 74HC595.11 30.77,18.75 31.66,19.47 RADIO.2
SCL
  Top 0.3: U$49.P$16 31.7,87.72 | 31.7,87.72 31.7,84.6 JP3.4 | CCS811.P$3 31.66,87.72 31.7,87.72
  Bottom 0.3: BME280.P$2 62,95.01 54.79,87.8 33.29,87.8 31.8,86.31 JP3.4
SDA
  Top 0.3: CCS811.P$4 29.26,87.59 JP3.3
  Bottom 0.3: BME280.P$1 59.46,93.37 54.49,88.4 30.99,88.4 29.26,86.67 JP3.3
SHIFT
  Top 0.3: 74HC595.14 28.94,19.4 28.19,20.84 RADIO.5
SP+
  Bottom 0.5: R1.1 96.98,37.59 C1.1 96.58,37.09
  Bottom 0.8: D7.C 96.59,37.1 | 96.59,37.1 96.58,37.09 | U$11.2 U$10.2 91.99,32 | 96.59,37.1 93.59,37.1 91.99,35.5 91.99,32 | U$9.2 91.99,32
SP+1
  Bottom 0.5: R2.1 96.98,86.59 C2.1 96.58,86.09
  Bottom 0.8: D14.C 96.59,86.1 | 96.59,86.1 96.58,86.09 | U$22.2 U$21.2 91.99,81 | 96.59,86.1 93.59,86.1 91.99,84.5 91.99,81 | U$20.2 91.99,81
SP+-  (via drill 0.5)
  Top 0.8: SP-OUT.1 100.52,3.43 U$7.1 101.29,16.8 101.49,17 | 101.49,17 109.49,17 110.64,18.15 U$8.OUT-21 | 101.49,17 v95.04,17 U$3.OUT-21 95.04,21.55 96.99,23.5 104.99,23.5 106.49,25 106.49,29.5 101.99,34 v94.04,34
  Bottom 0.5: PWR.C 99.27,34.34 C1.2 97.04,34.34
  Bottom 0.8: U$2.OUT 85.09,18.4 D2.C 85.09,15.9 85.99,15 94.99,15 | U$3.OUT-21 v95.04,17 | v95.04,17 95.04,16.55 | D3.C v95.04,17 | 94.99,15 109.49,15 110.64,16.15 110.64,17 | U$8.OUT-21 110.64,17 | D6.C 110.64,17 | v95.04,17 95.04,15.05 94.99,15 | v94.04,34 96.19,34 C1.2
SP+-1  (via drill 0.5)
  Top 0.8: SP-OUT1.1 100.52,52.43 U$16.1 101.29,65.8 101.49,66 | 101.49,66 109.49,66 110.64,67.15 U$19.OUT-21 | 101.49,66 v95.04,66 U$14.OUT-21 95.04,70.55 96.99,72.5 104.99,72.5 106.49,74 106.49,78.5 101.99,83 v94.04,83
  Bottom 0.5: PWR1.C 99.27,83.34 C2.2 97.04,83.34
  Bottom 0.8: U$13.OUT 85.09,67.4 D9.C 85.09,64.9 85.99,64 94.99,64 | U$14.OUT-21 v95.04,66 | v95.04,66 95.04,65.55 | D10.C v95.04,66 | 94.99,64 109.49,64 110.64,65.15 110.64,66 | U$19.OUT-21 110.64,66 | D13.C 110.64,66 | v95.04,66 95.04,64.05 94.99,64 | v94.04,83 96.19,83 C2.2
SP-
  Top 0.8: SP-OUT.2 103.06,3.43 U$7.2 102.29,7.8 112.49,18 112.49,21 114.99,23.5 120.99,23.5 122.49,25 122.49,33 115.49,40 104.49,40 103.06,41.43 JP1.1
  pour Top: 78.99,46 124.59,46 124.59,0 78.99,0
  pour Bottom: 78.99,46 124.59,46 124.59,0 78.99,0
SP-1
  Top 0.8: SP-OUT1.2 103.06,52.43 U$16.2 102.29,56.8 112.49,67 112.49,70 114.99,72.5 120.99,72.5 122.49,74 122.49,82 115.49,89 104.49,89 103.06,90.43 JP2.1
  pour Top: 78.99,95 124.59,95 124.59,49 78.99,49
  pour Bottom: 78.99,95 124.59,95 124.59,49 78.99,49
WAC
  Top 0.3: CCS811.P$5 17.72,99 R28.1

## Text on the board
tPlace: 1V | 1V | 1V | 0.5V | 0.5V | 0.5V | 0V | 0V | 0V | 1V | 1V | 1V | 0.5V | 0.5V | 0.5V | 0V | 0V | 0V
bPlace: 1V | 1V | 1V | 0.5V | 0.5V | 0.5V | 0V | 0V | 0V | 1V | 1V | 1V | 0.5V | 0.5V | 0.5V | 0V | 0V | 0V
tNames: to Sat | + | - | GND | 5V | SDA | SCL | FOT0 | FOT1 | PWR_16V | Solder / on the / last SP | to Sat | + | - | Solder / on the / last SP